# Altium PCB RDdengkuan - 副本 - 副本.PcbDoc (part 1 of 2)
Units mm, origin at the board's own origin, x right, y up, seen from the top; angles counter-clockwise.
Board outline 99.8 x 100 mm, 4 copper layers (Top Layer, VCC, GND, Bottom Layer); 147 components, 96 nets, 586 pads, 184 vias.
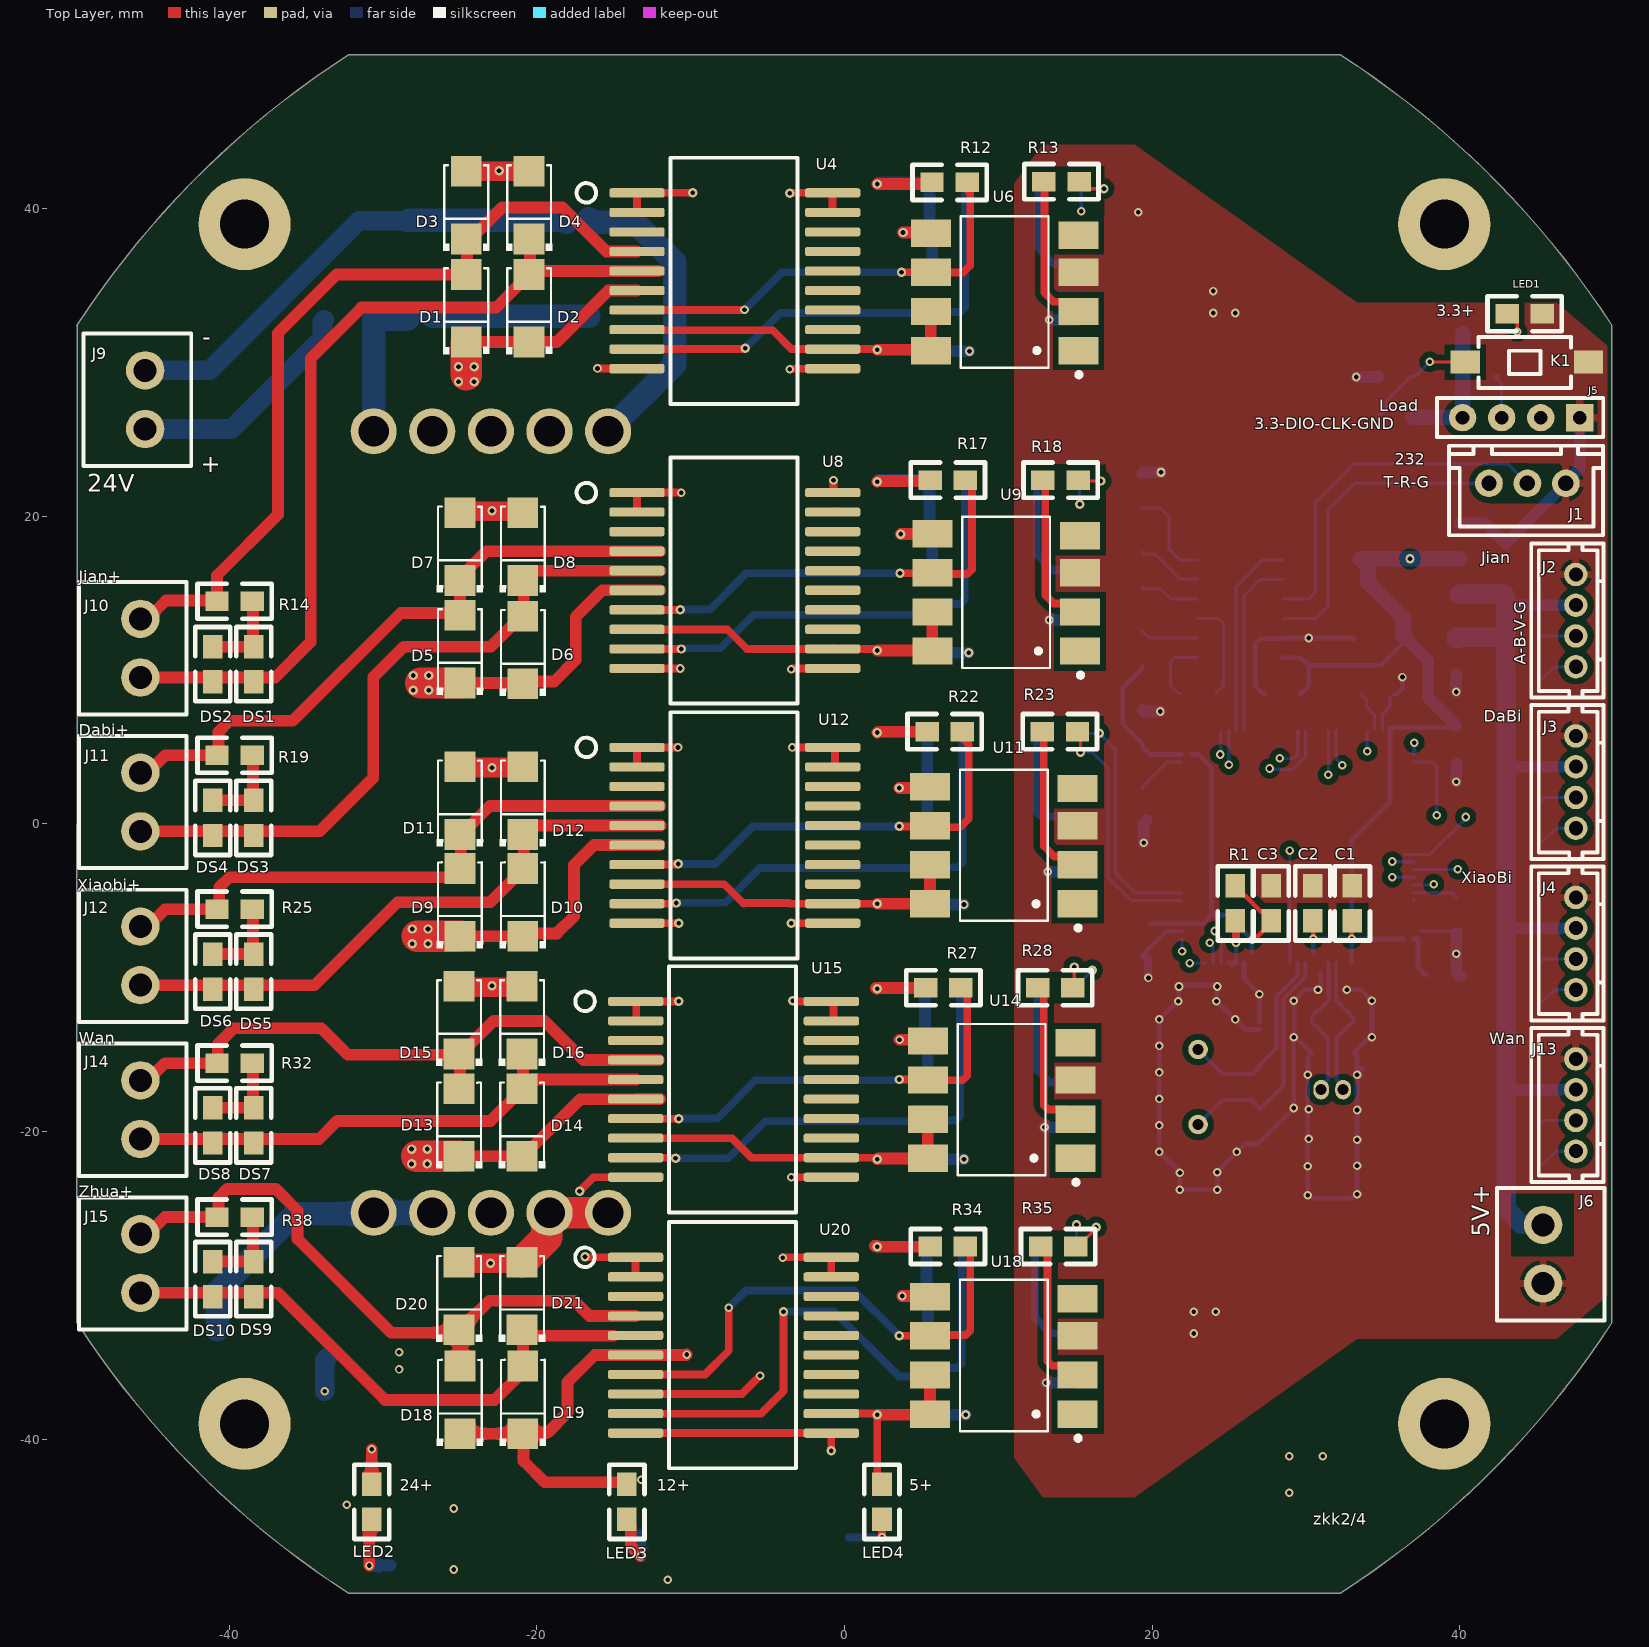
[diagram p0: Top Layer view]
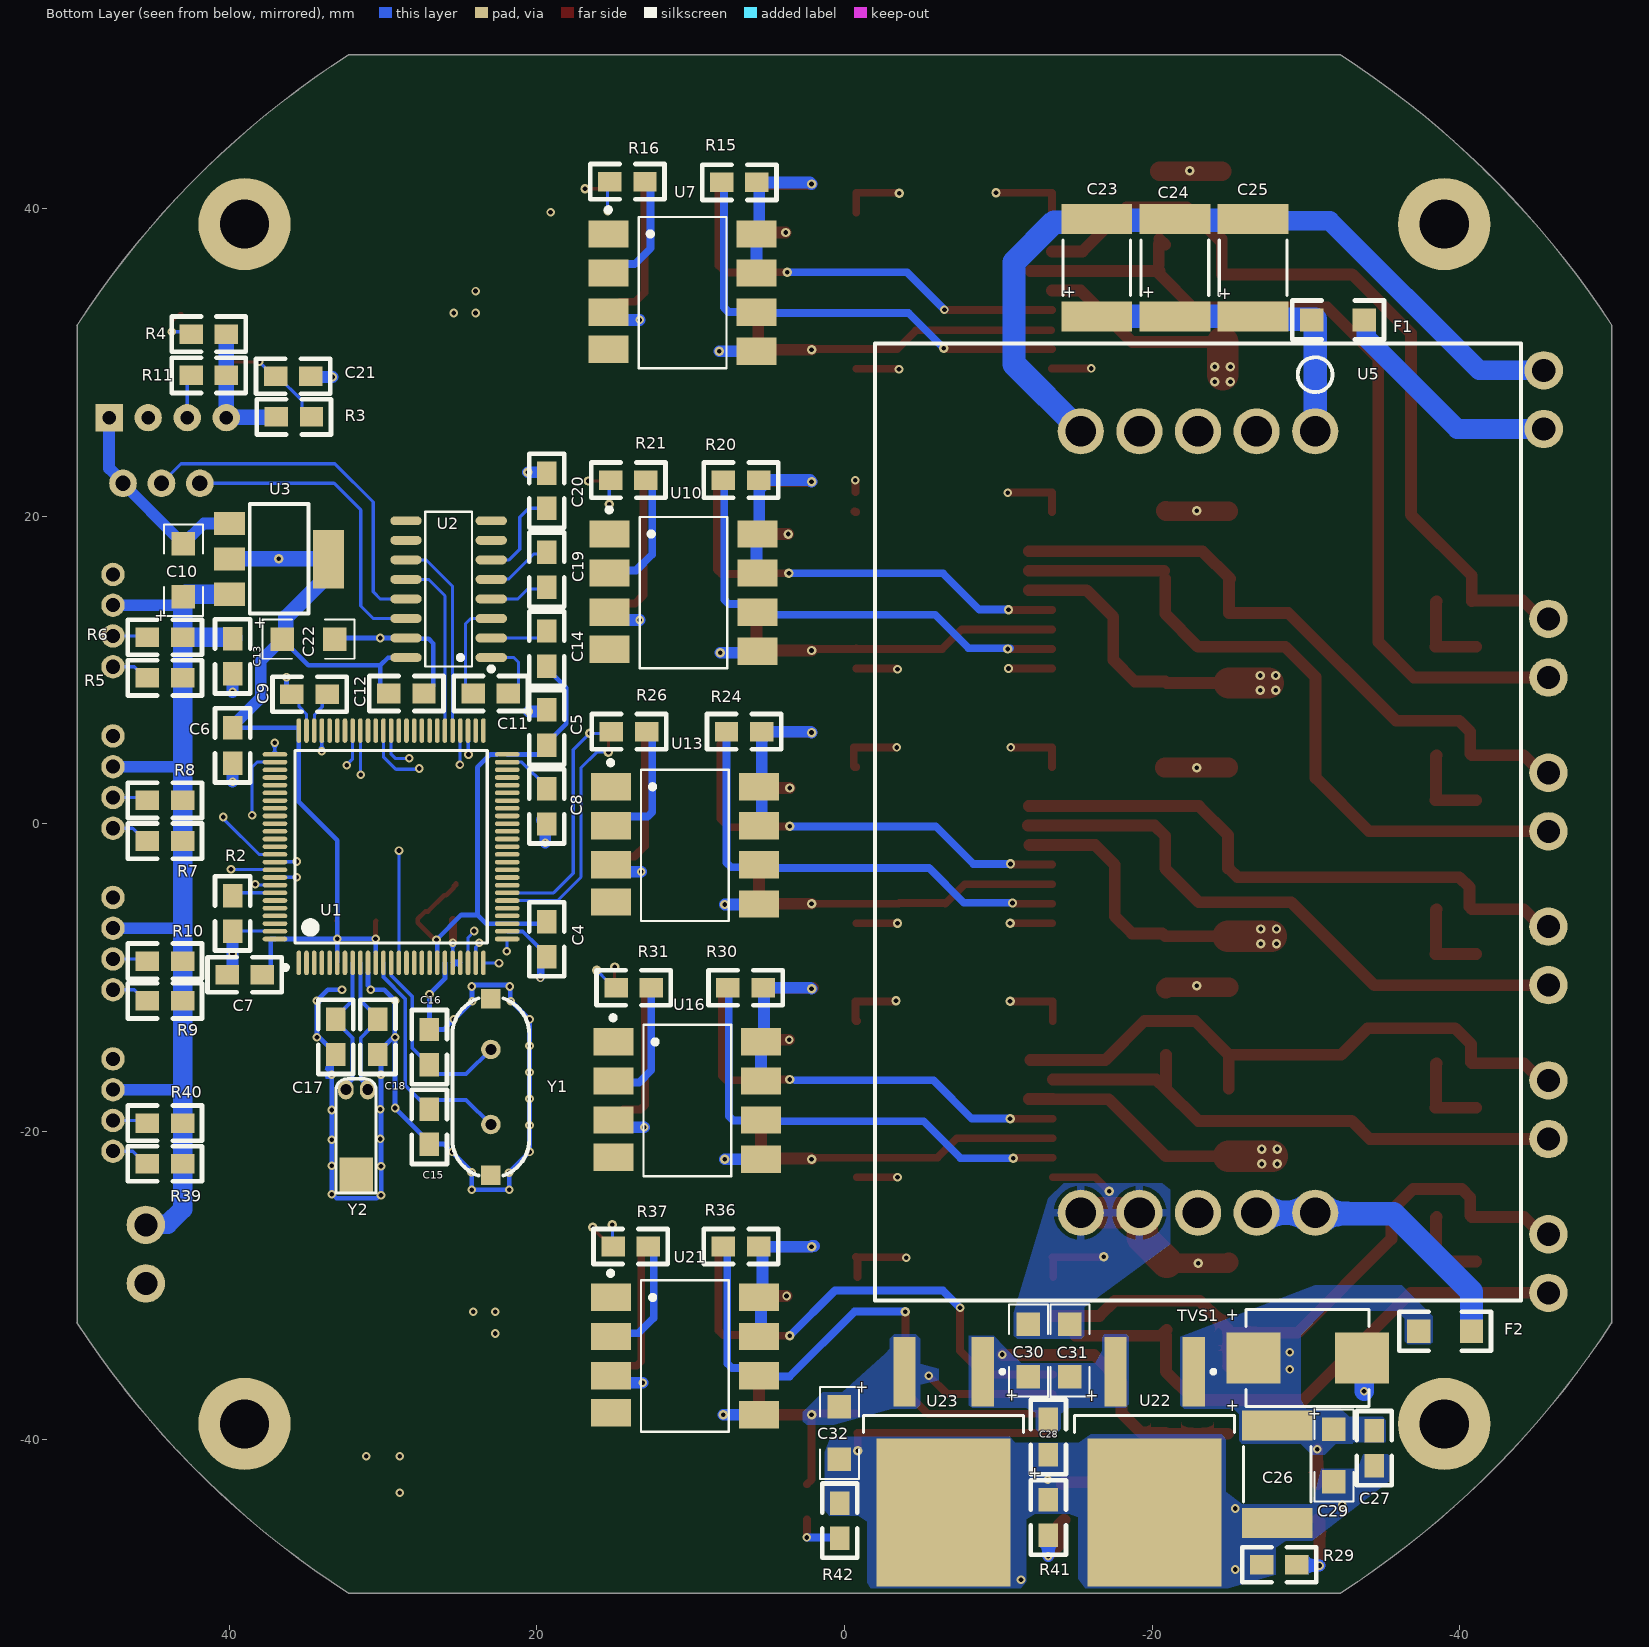
[diagram p1: Bottom Layer view, seen from below]
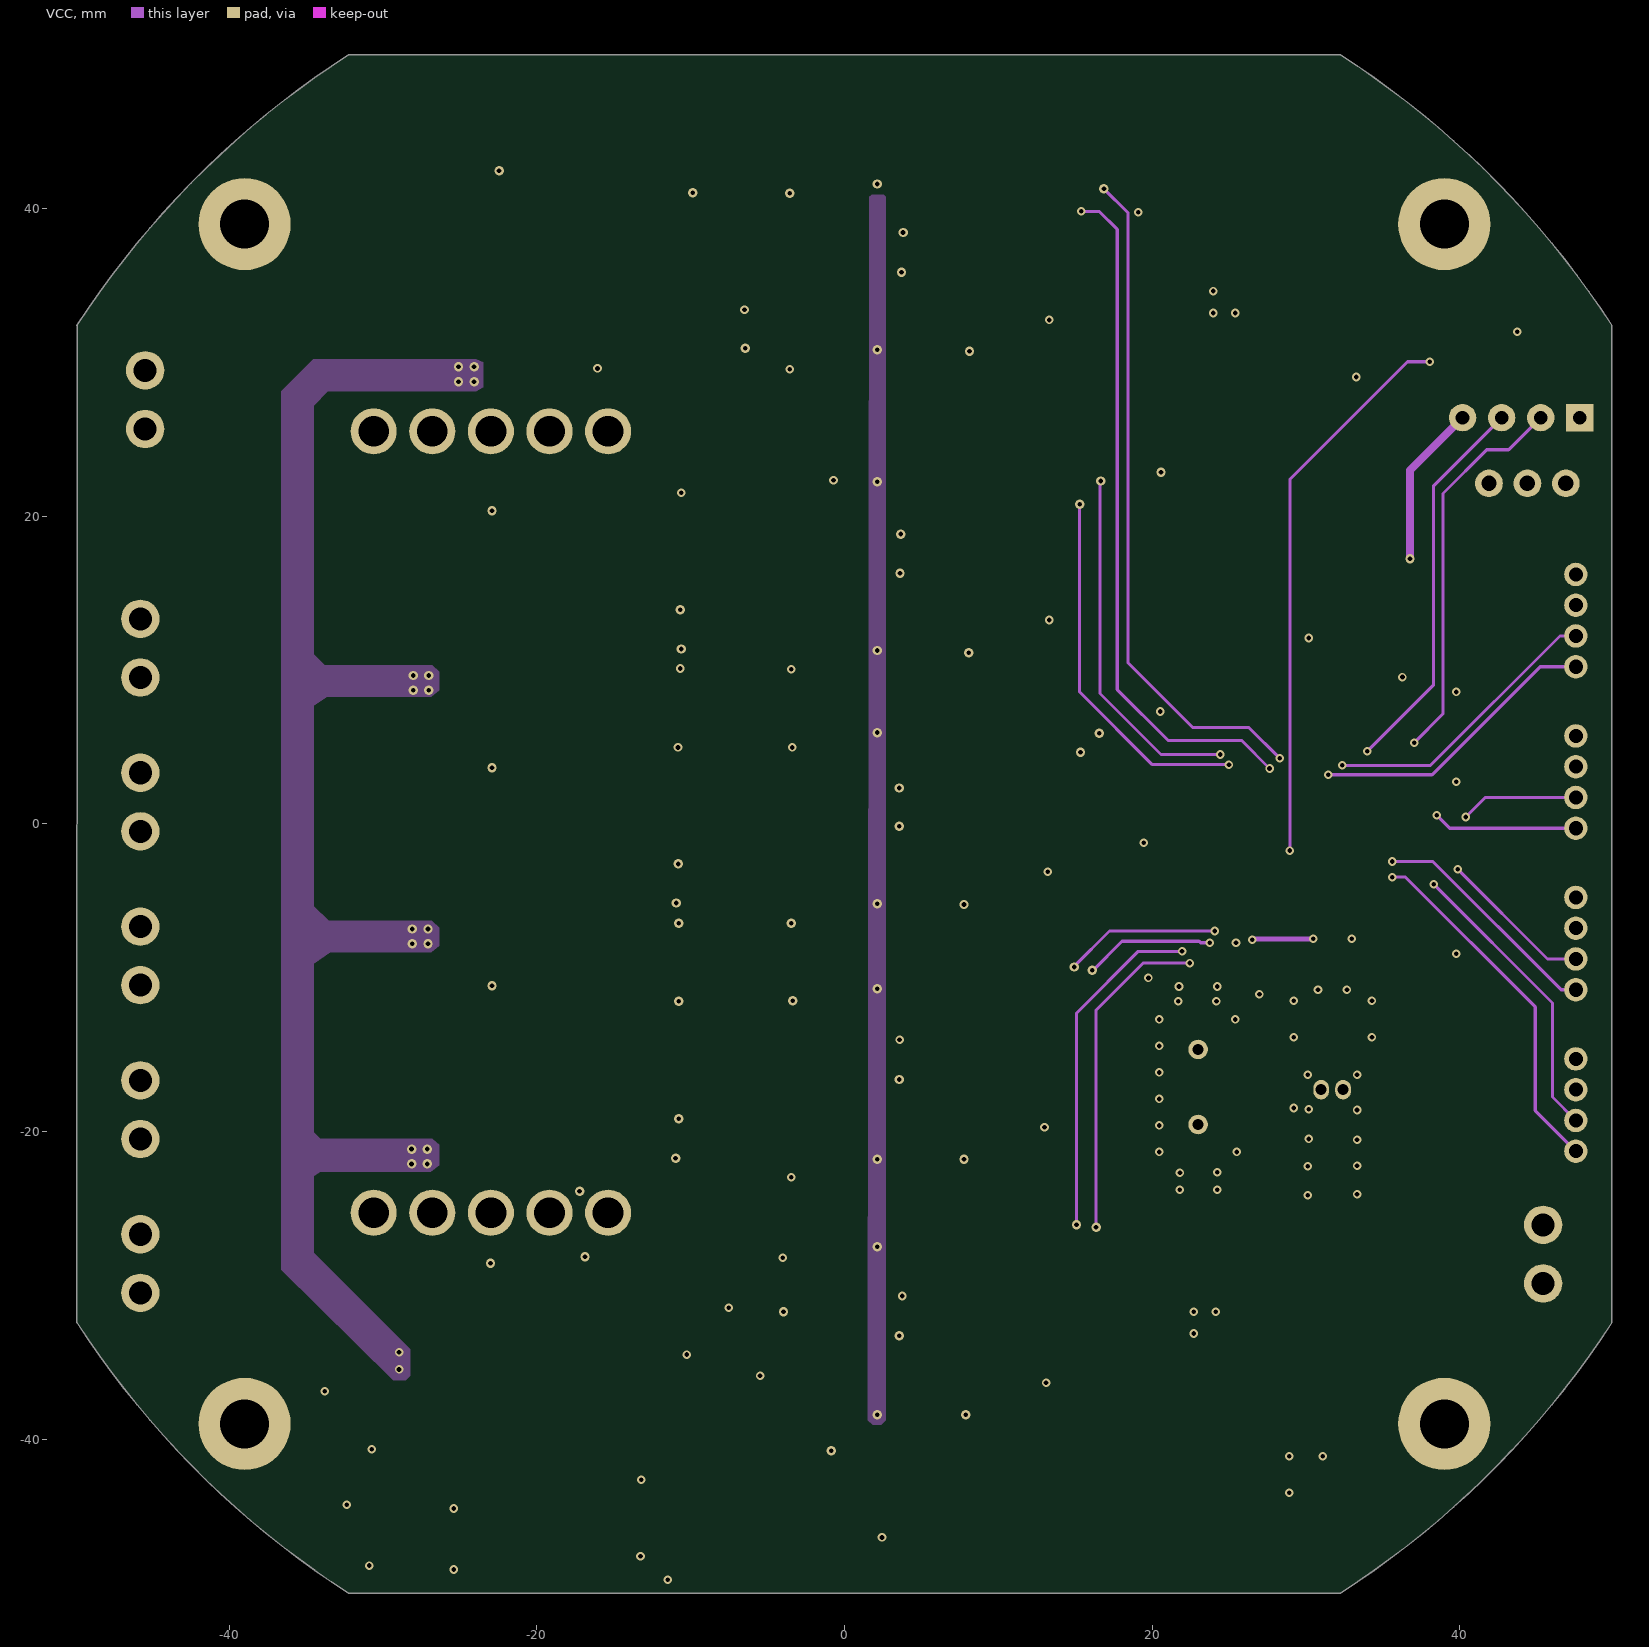
[diagram p2: VCC]
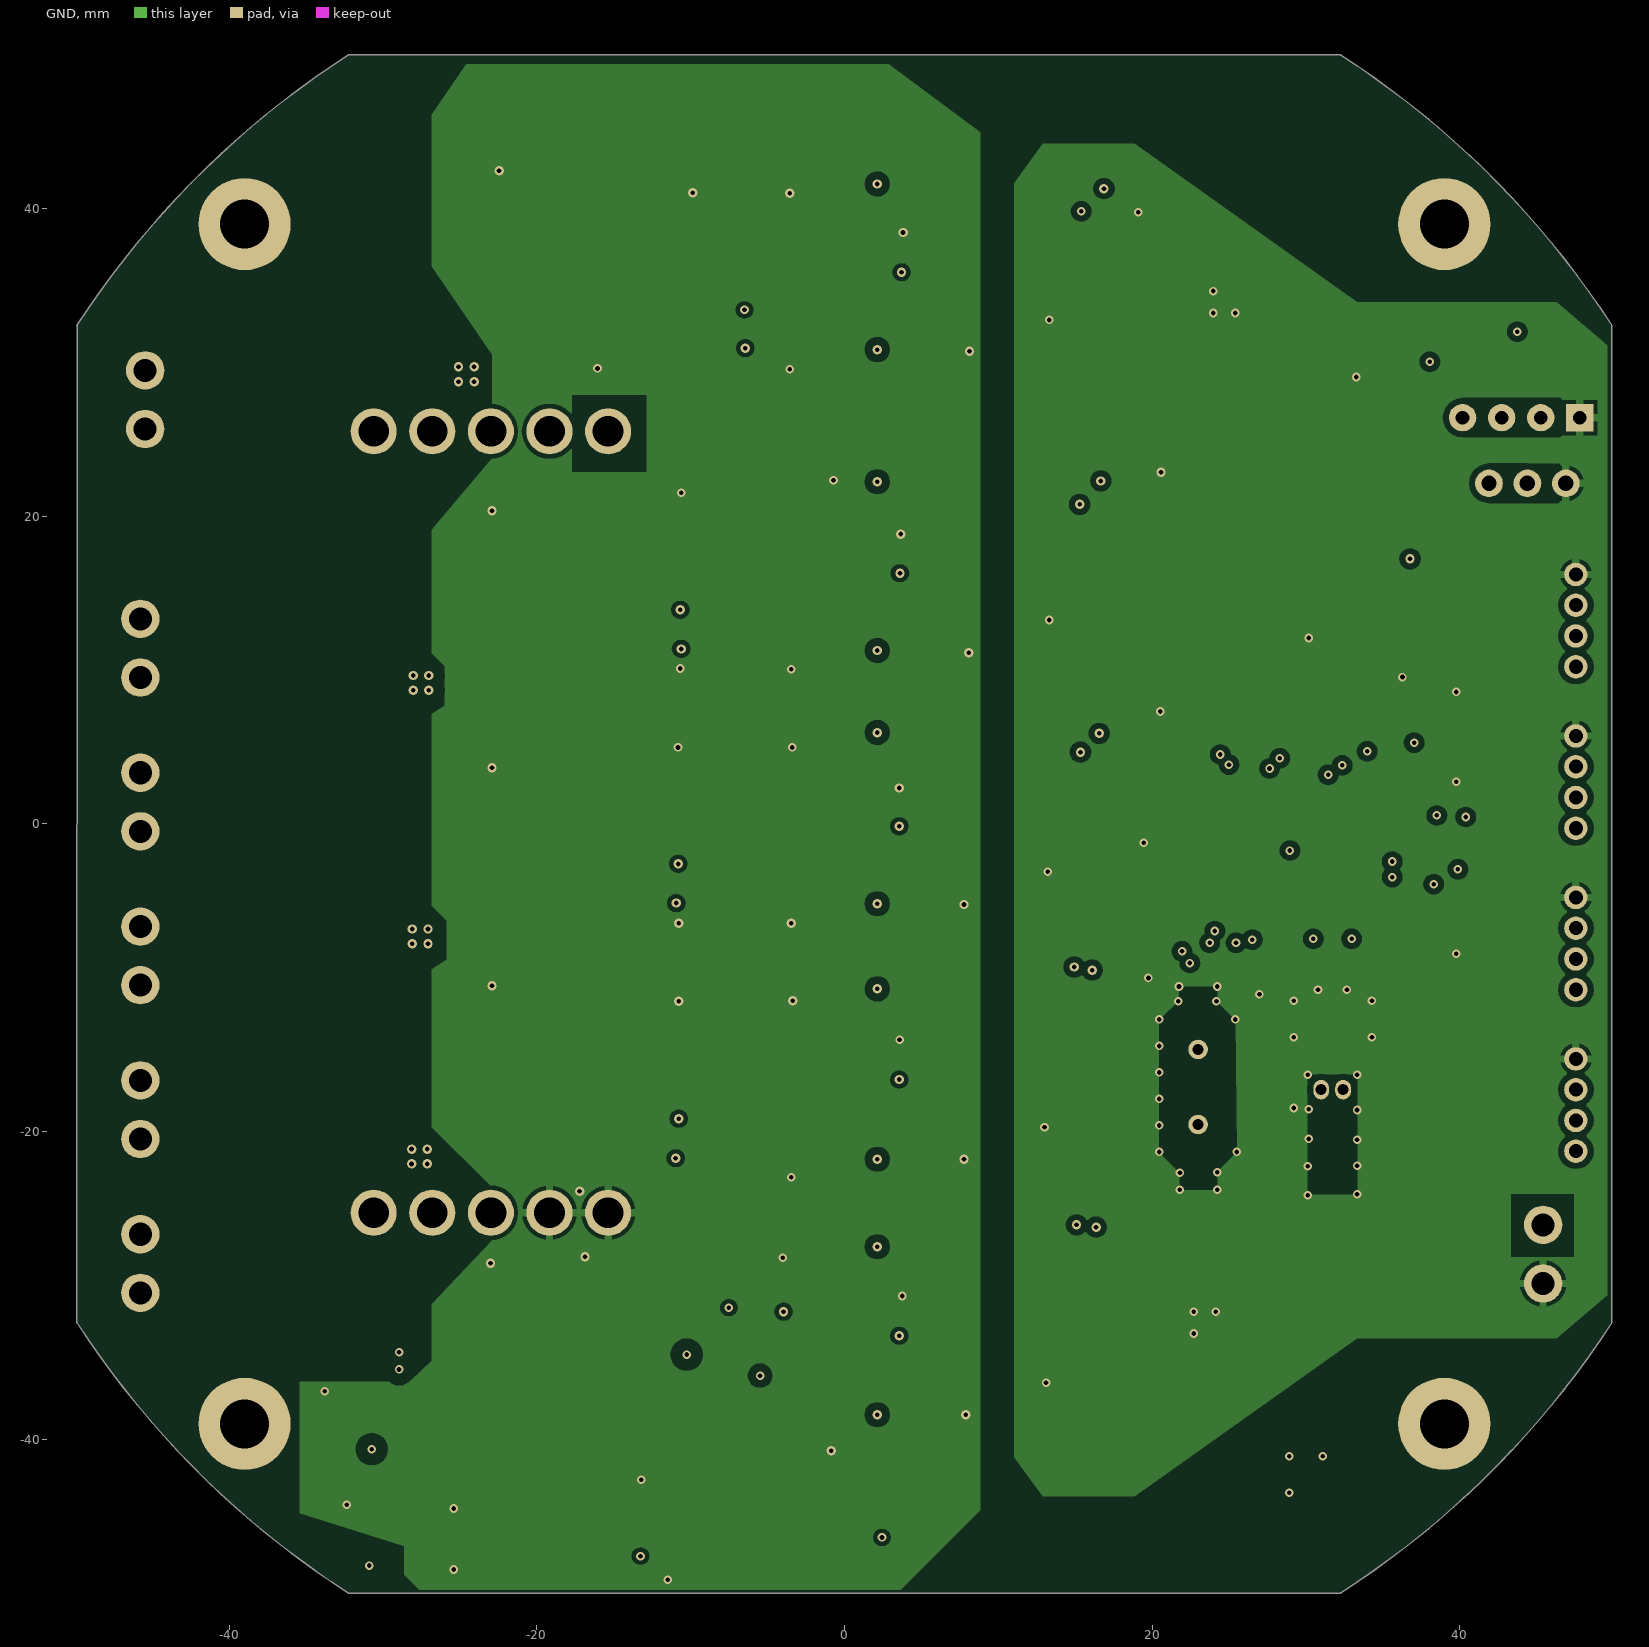
[diagram p3: GND]

## Layer stack, top to bottom
Top Solder: solder mask 0.0102, Solder Resist, Dk 3.5
Top Layer: signal copper 0.0356
Dielectric1: core 0.32, FR-4, Dk 4.8
VCC: signal copper 0.0356
Dielectric2: prepreg 0.32, FR-4, Dk 4.8
GND: signal copper 0.0356
Dielectric3: core 0.32, FR-4, Dk 4.8
Bottom Layer: signal copper 0.0356
Bottom Solder: solder mask 0.0102, Solder Resist, Dk 3.5

## Board outline
-49.894,-32.416 -49.886,32.406 -49.901,32.406 cw(c0,0) -32.253,50 32.253,50 cw(c0,0) 49.894,32.416 49.886,32.41 49.886,-32.406 49.896,-32.413 cw(c0,0) 32.253,-50 -32.253,-50 cw(c0,0)

## Design rules (kind name [scope] priority, off if disabled: settings)
Clearance GND1 [InNet('GND1')] p1: gap=0.381 ignorepadtopadclearanceinfootprint=TRUE
Clearance netcf [InNet('NetF1_1')  or InNet('NetC23_1')or InNet('NetC23_2')] p2: gap=0.762 ignorepadtopadclearanceinfootprint=TRUE
Clearance 3.3 [InNet('+3.3V')] p3: gap=0.381 ignorepadtopadclearanceinfootprint=TRUE
Clearance +5V [InNet('+5V')] p4: gap=0.508 ignorepadtopadclearanceinfootprint=TRUE
Clearance V5 [InNet('VCC_5V')] p5: gap=0.508 ignorepadtopadclearanceinfootprint=TRUE
Clearance Polygon [InNet('VCC_24V') or InNet('OUT1') or  InNet('OUT2') or  InNet('OUT3') or  InNet('OUT4') or  InNet('OUT5') or  InNet('OUT6') or  InNet('OUT7') or  InNet('OUT8') or  InNet('OUT9') or  InNet('OUT10') OR InNet('VCC_12V')] p6: gap=0.762 ignorepadtopadclearanceinfootprint=TRUE except(0.305: THPad-THPad THPad-Fill THPad-Poly THPad-Region)
Clearance [All] p7: gap=0.279 ignorepadtopadclearanceinfootprint=TRUE
FabricationTestPointUsage TestPointUsage [All] p1: valid=0 allowmultiple=FALSE
FabricationTestpoint Testpoint [All] p1: side=3 testpointundercomponent=TRUE minsize=1.016 maxsize=2.54 preferedsize=1.524 minholesize=0 maxholesize=1.016 preferedholesize=0.813 testpointgrid=0.025 allowsidetop=TRUE allowsidebottom=TRUE usegrid=TRUE gridtolerance=0
HoleSize [All] p1: absolutevalues=TRUE maxlimit=3.81 minlimit=0.254 maxpercent=80.000 minpercent=20.000
MinimumSolderMaskSliver [All] p1: minsoldermaskwidth=0.051
PlaneClearance [InNet('GND1')] p1: clearance=0.254
PolygonConnect PGND2B [OnBottomLayer{ InNet('GND2') }] p1: thpad.connectstyle=Relief thpad.reliefconductorwidth=0.508 thpad.reliefentries=4 thpad.polygonreliefangle="90 Angle" thpad.airgapwidth=0.254 smdpad.connectstyle=Direct smdpad.reliefconductorwidth=0.254 smdpad.reliefentries=4 smdpad.polygonreliefangle="90 Angle" smdpad.airgapwidth=0.254 via.connectstyle=Direct via.reliefconductorwidth=0.254 via.reliefentries=4 via.polygonreliefangle="90 Angle" via.airgapwidth=0.254
PolygonConnect PV24 [InNet('VCC_24V')] p2: thpad.connectstyle=Relief thpad.reliefconductorwidth=1.27 thpad.reliefentries=4 thpad.polygonreliefangle="90 Angle" thpad.airgapwidth=0.203 smdpad.connectstyle=Direct smdpad.reliefconductorwidth=0.762 smdpad.reliefentries=4 smdpad.polygonreliefangle="90 Angle" smdpad.airgapwidth=0.305 via.connectstyle=Direct via.reliefconductorwidth=0.254 via.reliefentries=4 via.polygonreliefangle="90 Angle" via.airgapwidth=0.254
PolygonConnect PV12 [InNet('VCC_12V')] p3: thpad.connectstyle=Relief thpad.reliefconductorwidth=0.254 thpad.reliefentries=4 thpad.polygonreliefangle="90 Angle" thpad.airgapwidth=0.254 smdpad.connectstyle=Direct smdpad.reliefconductorwidth=0.254 smdpad.reliefentries=4 smdpad.polygonreliefangle="90 Angle" smdpad.airgapwidth=0.254 via.connectstyle=Direct via.reliefconductorwidth=0.254 via.reliefentries=4 via.polygonreliefangle="90 Angle" via.airgapwidth=0.254
PolygonConnect PV5 [InNet('VCC_5V')] p4: connectstyle=Direct reliefconductorwidth=0.254 reliefentries=4 polygonreliefangle="90 Angle" airgapwidth=0.254
PolygonConnect PGND1 [InNet('GND1')] p5: thpad.connectstyle=Relief thpad.reliefconductorwidth=0.508 thpad.reliefentries=4 thpad.polygonreliefangle="90 Angle" thpad.airgapwidth=0.254 smdpad.connectstyle=Direct smdpad.reliefconductorwidth=0.305 smdpad.reliefentries=4 smdpad.polygonreliefangle="90 Angle" smdpad.airgapwidth=0.254 via.connectstyle=Direct via.reliefconductorwidth=0.305 via.reliefentries=4 via.polygonreliefangle="90 Angle" via.airgapwidth=0.254
PolygonConnect PGND2D [InComponent('D3')or  InComponent('D4') or InComponent('D7')or InComponent('D8')or InComponent('D11')or InComponent('D12')or InComponent('D15')or InComponent('D16')or InComponent('D20')or InComponent('D21')or  InComponent('C3')or  InComponent('C2')or   InComponent('C1')] p6: connectstyle=Direct reliefconductorwidth=0.254 reliefentries=4 polygonreliefangle="90 Angle" airgapwidth=0.254
PolygonConnect PGND2 [InNet('GND2')] p7: thpad.connectstyle=Relief thpad.reliefconductorwidth=0.508 thpad.reliefentries=4 thpad.polygonreliefangle="90 Angle" thpad.airgapwidth=0.254 smdpad.connectstyle=Relief smdpad.reliefconductorwidth=0.508 smdpad.reliefentries=4 smdpad.polygonreliefangle="90 Angle" smdpad.airgapwidth=0.254 via.connectstyle=Direct via.reliefconductorwidth=0.305 via.reliefentries=4 via.polygonreliefangle="90 Angle" via.airgapwidth=0.305
PolygonConnect [All] p8: connectstyle=Relief reliefconductorwidth=0.254 reliefentries=4 polygonreliefangle="90 Angle" airgapwidth=0.254
RoomDefinition RD [InComponentClass('RD')] p1: confinementstyle=ConfineIn formatcopy=TRUE lockcomponents=FALSE outline -118.11,-226.695 -67.31,-226.695 -67.31,-201.295 -118.11,-201.295
RoutingVias [All] p1: holewidth=0.191 width=0.381 viastyle="Through Hole" minholewidth=0.127 minwidth=0.254 maxholewidth=0.711 maxwidth=1.27
SilkToSilkClearance [All] p1: silktosilkclearance=0.025
SilkToSolderMaskClearance SilkscreenOverComponentPads [IsPad] p1: minsilkscreentomaskgap=0.025 clearancetoexposedcopper=TRUE
SolderMaskExpansion [All] p1: expansion=0.102 istentingtop=FALSE
Width [All] p1: maxlimit=5.08 minlimit=0.203 preferedwidth=0.254 toplayer_prefwidth=0.203 minimp=50.000000 maximp=50.000000 favimp=50.000000
23 further rules are at their usual default settings.

## Components (designator, comment, footprint, x,y, rotation, side; value= is the part's Value field where it differs from the comment)
C1 "104" 0805 33.02,-6.299 r90 top
C2 "104" 0805 30.446,-6.299 r90 top
C3 "104" 0805 27.737,-6.299 r90 top
C4 "104" 0805 19.355,-6.35 r270 bottom
C5 "104" 0805 19.355,5.131 r90 bottom
C6 "104" 0805 39.776,6.248 r270 bottom
C7 "104" 0805 37.846,-9.804 r0 bottom
C8 "4.7uF" 0805 19.355,0 r90 bottom
C9 "4.7uF" 0805 35.916,8.433 r180 bottom
C10 "Cap Pol1" 钽电容小 42.85,16.434 r270 bottom value=10uF
C11 "104" 0805 24.13,8.484 r180 bottom
C12 "104" 0805 29.616,8.484 r180 bottom
C13 "104" 0805 39.776,9.754 r90 bottom
C14 "104" 0805 19.355,12.548 r270 bottom
C15 "22pF" 0805 26.975,-20.828 r90 bottom
C16 "22pF" 0805 26.975,-13.36 r270 bottom
C17 "22pF" 0805 33.071,-14.986 r90 bottom
C18 "22pF" 0805 30.328,-14.986 r90 bottom
C19 "104" 0805 19.355,17.678 r270 bottom
C20 "104" 0805 19.355,22.809 r270 bottom
C21 "104" 0805 36.982,29.108 r180 bottom
C22 "Cap Pol1" 钽电容小 34.9,11.887 r0 bottom value=10uF
C23 "Cap Pol1" 钽电容大 -16.408,36.17 r180 bottom value=22uF
C24 "Cap Pol1" 钽电容大 -21.488,36.17 r180 bottom value=100uF
C25 "Cap Pol1" 钽电容大 -26.568,36.17 r180 bottom value=100uF
C26 "Cap Pol1" 钽电容大 -28.143,-42.266 r0 bottom value=100uF
C27 "0.1uF" 0805 -34.442,-41.719 r90 bottom
C28 "0.1uF" 0805 -13.259,-40.996 r90 bottom
C29 "Cap Pol1" 钽电容小 -31.699,-40.996 r90 bottom value=2.2uF
C30 "Cap Pol1" 钽电容小 -12.09,-34.29 r270 bottom value=1uF
C31 "Cap Pol1" 钽电容小 -14.783,-34.29 r270 bottom value=2.2uF
C32 "Cap Pol1" 钽电容小 0.457,-39.522 r90 bottom value=1uF
D1 "Diode 1N4149" 肖特基二极管SS34 -24.566,33.528 r90 top
D2 "Diode 1N4149" 肖特基二极管SS34 -20.472,33.528 r90 top
D3 "Diode 1N4149" 肖特基二极管SS34 -24.566,40.234 r90 top
D4 "Diode 1N4149" 肖特基二极管SS34 -20.472,40.234 r90 top
D5 "Diode 1N4149" 肖特基二极管SS34 -24.972,11.364 r90 top
D6 "Diode 1N4149" 肖特基二极管SS34 -20.879,11.313 r90 top
D7 "Diode 1N4149" 肖特基二极管SS34 -24.972,18.033 r90 top
D8 "Diode 1N4149" 肖特基二极管SS34 -20.879,18.033 r90 top
D9 "Diode 1N4149" 肖特基二极管SS34 -24.972,-5.095 r90 top
D10 "Diode 1N4149" 肖特基二极管SS34 -20.879,-5.095 r90 top
D11 "Diode 1N4149" 肖特基二极管SS34 -24.972,1.523 r90 top
D12 "Diode 1N4149" 肖特基二极管SS34 -20.879,1.523 r90 top
D13 "Diode 1N4149" 肖特基二极管SS34 -25.023,-19.406 r90 top
D14 "Diode 1N4149" 肖特基二极管SS34 -20.93,-19.406 r90 top
D15 "Diode 1N4149" 肖特基二极管SS34 -25.023,-12.752 r90 top
D16 "Diode 1N4149" 肖特基二极管SS34 -20.93,-12.752 r90 top
D18 "Diode 1N4149" 肖特基二极管SS34 -24.972,-37.44 r90 top
D19 "Diode 1N4149" 肖特基二极管SS34 -20.879,-37.44 r90 top
D20 "Diode 1N4149" 肖特基二极管SS34 -25.023,-30.683 r90 top
D21 "Diode 1N4149" 肖特基二极管SS34 -20.93,-30.683 r90 top
DS1 "LED" 0805 -38.405,9.246 r90 top
DS2 "LED" 0805 -41.072,11.532 r270 top
DS3 "LED" 0805 -38.405,-0.749 r90 top
DS4 "LED" 0805 -41.072,1.537 r270 top
DS5 "LED" 0805 -38.405,-10.744 r90 top
DS6 "LED" 0805 -41.072,-8.458 r270 top
DS7 "LED" 0805 -38.405,-20.739 r90 top
DS8 "LED" 0805 -41.072,-18.453 r270 top
DS9 "LED" 0805 -38.405,-30.734 r90 top
DS10 "LED" 0805 -41.072,-28.448 r270 top
F1 "THERMAL FUSE" 1206 -33.807,32.766 r0 bottom
F2 "THERMAL FUSE" 1206 -40.767,-32.969 r0 bottom
J1 "CON3" CON3BB 44.399,22.149 r180 top
J2 "CON4" CONN4B 47.549,13.224 r90 top
J3 "CON4" CONN4B 47.549,2.725 r90 top
J4 "CON4" CONN4B 47.549,-7.773 r90 top
J5 "CON4" CON4 43.993,26.416 r0 top
J6 "CON2" CONN-TH_2P-P3.81_DB2EVC-3.81-2P-BK 45.415,-27.965 r90 top
J9 "CON2" CONN-TH_2P-P3.81_DB2EVC-3.81-2P-BK -45.466,27.584 r270 top
J10 "CON2" CONN-TH_2P-P3.81_DB2EVC-3.81-2P-BK -45.771,11.43 r270 top
J11 "CON2" CONN-TH_2P-P3.81_DB2EVC-3.81-2P-BK -45.771,1.429 r270 top
J12 "CON2" CONN-TH_2P-P3.81_DB2EVC-3.81-2P-BK -45.771,-8.572 r270 top
J13 "CON4" CONN4B 47.549,-18.272 r90 top
J14 "CON2" CONN-TH_2P-P3.81_DB2EVC-3.81-2P-BK -45.771,-18.574 r270 top
J15 "CON2" CONN-TH_2P-P3.81_DB2EVC-3.81-2P-BK -45.771,-28.575 r270 top
K1 "KEY4" 按钮 44.238,29.964 r0 top
LED1 "LED" 0805 43.078,33.172 r0 top
LED2 "LED" 0805 -30.734,-42.926 r270 top
LED3 "LED" 0805 -14.148,-42.926 r270 top
LED4 "LED" 0805 2.438,-42.926 r270 top
R1 "10R" 0805 25.4,-6.299 r90 top
R2 "10K" 0805 39.776,-4.674 r270 bottom
R3 "1.5K" 0805 34.646,26.467 r0 bottom
R4 "10K" 0805 42.469,31.852 r180 bottom
R5 "10K" 0805 45.314,9.5 r180 bottom
R6 "10K" 0805 45.314,12.141 r180 bottom
R7 "10K" 0805 45.314,-1.106 r180 bottom
R8 "10K" 0805 45.314,1.535 r180 bottom
R9 "10K" 0805 45.314,-11.499 r180 bottom
R10 "10K" 0805 45.314,-8.908 r180 bottom
R11 "10K" 0805 42.469,29.159 r180 bottom
R12 "332" 0805 5.691,41.708 r0 top
R13 "201" 0805 15.249,41.759 r180 top
R14 "10K" 0805 -38.506,14.478 r180 top
R15 "332" 0805 5.691,41.708 r0 bottom
R16 "201" 0805 15.249,41.759 r180 bottom
R17 "332" 0805 5.58,22.357 r0 top
R18 "201" 0805 15.189,22.357 r180 top
R19 "10K" 0805 -38.506,4.47 r180 top
R20 "332" 0805 5.58,22.357 r0 bottom
R21 "201" 0805 15.189,22.357 r180 bottom
R22 "332" 0805 5.369,6.003 r0 top
R23 "201" 0805 15.147,6.003 r180 top
R24 "332" 0805 5.377,6.003 r0 bottom
R25 "10K" 0805 -38.506,-5.537 r180 top
R26 "201" 0805 15.147,6.003 r180 bottom
R27 "332" 0805 5.284,-10.648 r0 top
R28 "201" 0805 14.842,-10.648 r180 top
R29 "Res2" 0805 -29.413,-48.158 r0 bottom value=10K
R30 "332" 0805 5.284,-10.648 r0 bottom
R31 "201" 0805 14.842,-10.648 r180 bottom
R32 "10K" 0805 -38.506,-15.545 r180 top
R34 "332" 0805 5.58,-27.466 r0 top
R35 "201" 0805 15.037,-27.466 r180 top
R36 "332" 0805 5.58,-27.466 r0 bottom
R37 "201" 0805 15.037,-27.466 r180 bottom
R38 "10K" 0805 -38.506,-25.552 r180 top
R39 "10K" 0805 45.314,-22.087 r180 bottom
R40 "10K" 0805 45.314,-19.445 r180 bottom
R41 "10K" 0805 -13.259,-46.228 r90 bottom
R42 "10K" 0805 0.305,-46.431 r90 bottom
TVS1 "TVS" TVS -30.115,-34.708 r270 bottom
U1 "STM32F407VGT6" STM32F407VGT6 29.437,0 r180 bottom locked
U2 "MAX3232" MAX3232 25.625,15.138 r90 bottom
U3 "AMS1117-3.3_C347222" AMS1117 36.842,17.379 r270 bottom
U4 "L298P" L298P -7.13,35.189 r180 top
U5 "URF4824QB-200W" URF4824QB-200W（24稳压） -23.114,0 r0 bottom locked
U6 "6n137" 6N137 10.414,34.036 r0 top
U7 "6n137" 6N137 10.525,35.101 r0 bottom
U8 "L298P" L298P -7.13,15.703 r180 top
U9 "6n137" 6N137 10.516,14.503 r0 top
U10 "6n137" 6N137 10.465,15.596 r0 bottom
U11 "6n137" 6N137 10.363,-1.93 r0 top
U12 "L298P" L298P -7.13,-0.864 r180 top
U13 "6n137" 6N137 10.372,-0.839 r0 bottom
U14 "6n137" 6N137 10.219,-18.466 r0 top
U15 "L298P" L298P -7.214,-17.374 r180 top
U16 "6n137" 6N137 10.211,-17.424 r0 bottom
U18 "6n137" 6N137 10.363,-35.103 r0 top
U20 "L298P" L298P -7.22,-34.012 r180 top
U21 "6n137" 6N137 10.372,-34.036 r0 bottom
U22 "7812" 7812 -20.168,-41.453 r180 bottom
U23 "7805" 7805 -6.452,-41.453 r180 bottom
Y1 "XTAL8" XTAL8（晶振） 23.114,-16.815 r90 bottom locked
Y2 "XTAL32-100" XTAL32-100（晶振） 31.75,-19.558 r270 bottom locked

## Footprints (in the part's own frame and the unit in brackets; to place one, negate y for a bottom-side part, rotate by r counter-clockwise, add the part's x,y. Pads: shape width x height; smd on the part's side, far side on the other; paste and mask are expansions set on the pad)
6N137 [mm]
  rect 2.6x1.78 smd mask+0.102: 1(4.796,-3.258) 2(4.796,-0.718) 3(4.796,1.822) 4(4.796,4.235) 5(-4.804,4.362) 6(-4.804,1.822) 7(-4.804,-0.718) 8(-4.804,-3.258)
  silkscreen extent -2.86,-4.98 4.98,5.47
0805 [mil]
  rect 60x50 smd: 1(0,0) 2(90,0)
  silkscreen extent -50,-45 140,45
1206 [mil]
  rect 60x60 smd: 1(0,0) 2(135,0)
  silkscreen extent -50,-50 185,50
7805 [mm]
  rect 1.45x4.5 smd: 1(2.54,5.848) 3(-2.54,5.848)
  rect 8.7x9.6 smd: 2(0,-3.302)
  silkscreen extent -5.2,1.9 5.2,5.97, body extent -5.2,-6.35 5.2,3, height 4.67
7812 [mm]
  rect 1.45x4.5 smd: 1(2.54,5.848) 3(-2.54,5.848)
  rect 8.7x9.6 smd: 2(0,-3.302)
  silkscreen extent -5.2,1.9 5.2,5.97, body extent -5.2,-6.35 5.2,3, height 4.67
AMS1117 [mil]
  rect 59x79 smd: 1(-84.88,-123.54) 2(5.67,-123.54) 3(96.22,-123.54)
  rect 150x79 smd: 4(6.34,130)
  silkscreen extent -134,-72 146,78
CON3BB [mm]
  round 1.8 hole 1 paste+0 mask+0.05: 1(-2.5,0) 2(0,0) 3(2.5,0)
  silkscreen extent -4.92,-2.44 5.09,3.38
CON4 [mil]
  rect 70x70 hole 35: 1(150,0)
  round 70 hole 35: 2(50,0) 3(-50,0) 4(-150,0)
  silkscreen extent -215,-50 210,50
CONN4B [mil]
  round 60 hole 36 paste+0 mask+1.97: 1(-118.11,0) 2(-39.37,0) 3(39.37,0) 4(118.11,0)
  silkscreen extent -197,-71 197,114
CONN-TH_2P-P3.81_DB2EVC-3.81-2P-BK [mm]
  round 2.5 hole 1.5: 1(-1.905,0) 2(1.905,0)
  silkscreen extent -4.3,-4 4.3,3
L298P [mm]
  rrect50% 3.6x0.6 smd: 1(6.361,-5.842) 2(6.361,-4.572) 3(6.361,-3.302) 4(6.361,-2.032) 5(6.361,-0.762) 6(6.361,0.508) 7(6.361,1.778) 8(6.361,3.048) 9(6.361,4.318) 10(6.361,5.588) 11(-6.361,5.588) 12(-6.361,4.318) 13(-6.361,3.048) 14(-6.361,1.778) 15(-6.361,0.508) 16(-6.361,-0.762) 17(-6.361,-2.032) 18(-6.361,-3.302) 19(-6.361,-4.572) 20(-6.361,-5.842)
  silkscreen extent -4.06,-8.13 10.28,7.87
MAX3232 [mm]
  oval 0.574x2.038 smd mask+0.102: 1(-4.317,-2.664) 2(-3.047,-2.664) 3(-1.777,-2.664) 4(-0.507,-2.664) 5(0.763,-2.664) 6(2.033,-2.664) 7(3.303,-2.664) 8(4.573,-2.664) 9(4.573,2.874) 10(3.303,2.874) 11(2.033,2.874) 12(0.763,2.874) 13(-0.507,2.874) 14(-1.777,2.874) 15(-3.047,2.874) 16(-4.317,2.874)
  silkscreen extent -5.21,-2.81 5.15,1.63
STM32F407VGT6 [mm]
  oval 0.3x1.6 smd paste-100 mask+0.051: 1(-6.032,-9.026) 2(-5.532,-9.026) 3(-5.032,-9.026) 4(-4.532,-9.026) 5(-4.032,-9.026) 6(-3.532,-9.026) 7(-3.032,-9.026) 8(-2.532,-9.026) 9(-2.032,-9.026) 10(-1.532,-9.026) 11(-1.032,-9.026) 12(-0.532,-9.026) 13(-0.032,-9.026) 14(0.468,-9.026) 15(0.968,-9.026) 16(1.468,-9.026) 17(1.968,-9.026) 18(2.468,-9.026) 19(2.968,-9.026) 20(3.468,-9.026) 21(3.968,-9.026) 22(4.468,-9.026) 23(4.968,-9.026) 24(5.468,-9.026) 25(5.968,-9.026) 51(5.968,6.073) 52(5.468,6.073) 53(4.968,6.073) 54(4.468,6.073) 55(3.968,6.073) 56(3.468,6.073) 57(2.968,6.073) 58(2.468,6.073) 59(1.968,6.073) 60(1.468,6.073) 61(0.968,6.073) 62(0.468,6.073) 63(-0.032,6.073) 64(-0.532,6.073) 65(-1.032,6.073) 66(-1.532,6.073) 67(-2.032,6.073) 68(-2.532,6.073) 69(-3.032,6.073) 70(-3.532,6.073) 71(-4.032,6.073) 72(-4.532,6.073) 73(-5.032,6.073) 74(-5.532,6.073) 75(-6.032,6.073)
  oval 1.6x0.3 smd paste-100 mask+0.051: 26(7.518,-7.476) 27(7.518,-6.977) 28(7.518,-6.476) 29(7.518,-5.977) 30(7.518,-5.476) 31(7.518,-4.977) 32(7.518,-4.476) 33(7.518,-3.977) 34(7.518,-3.476) 35(7.518,-2.977) 36(7.518,-2.477) 37(7.518,-1.976) 38(7.518,-1.477) 39(7.518,-0.976) 40(7.518,-0.477) 41(7.518,0.024) 42(7.518,0.523) 43(7.518,1.024) 44(7.518,1.523) 45(7.518,2.024) 46(7.518,2.523) 47(7.518,3.024) 48(7.518,3.523) 49(7.518,4.024) 50(7.518,4.523) 76(-7.582,4.523) 77(-7.582,4.024) 78(-7.582,3.523) 79(-7.582,3.024) 80(-7.582,2.523) 81(-7.582,2.024) 82(-7.582,1.523) 83(-7.582,1.024) 84(-7.582,0.523) 85(-7.582,0.024) 86(-7.582,-0.477) 87(-7.582,-0.976) 88(-7.582,-1.477) 89(-7.582,-1.976) 90(-7.582,-2.476) 91(-7.582,-2.977) 92(-7.582,-3.476) 93(-7.582,-3.977) 94(-7.582,-4.476) 95(-7.582,-4.977) 96(-7.582,-5.476) 97(-7.582,-5.977) 98(-7.582,-6.476) 99(-7.582,-6.977) 100(-7.582,-7.476)
  silkscreen extent -7.06,-9.47 6.22,4.77
TVS [mm]
  rect 3.3x3.5 smd: 1(0,3.525) 2(0,-3.525)
  silkscreen extent -3.15,-4 3.15,4
URF4824QB-200W（24稳压） [mm]
  round 3 hole 2: 1(-7.493,-25.527) 2(-3.683,-25.527) 3(0.127,-25.527) 4(3.937,-25.527) 5(7.747,-25.527) 6(7.747,25.273) 7(3.937,25.273) 8(0.127,25.273) 9(-3.683,25.273) 10(-7.493,25.273)
  silkscreen extent -20.87,-31.24 21.13,30.99
XTAL8（晶振） [mil]
  round 50 hole 28: 1(-107.13,-5) 2(85,-5)
  rect 50x50 smd: ""(-237.44,-5) ""(215.31,-5)
  silkscreen extent -238,-103 216,93
XTAL32-100（晶振） [mil]
  oval 50x40 hole 28: 1(-90,-26) 2(-90,30)
  rect 92.13x86 smd: ""(130,1)
  silkscreen extent -118,-51 174,51
按钮 [mm]
  rect 1.9x1.5 smd mask+0.102: 1(-3.876,0.059) 2(4.124,0.059)
  silkscreen extent -3.01,-1.61 2.99,1.69
肖特基二极管SS34 [mm]
  rect 2x2 smd: 1(-2.2,0.029) 2(2.2,0.029)
  silkscreen extent -2.98,-1.47 2.6,1.53
钽电容大 [mm]
  rect 4.6x1.95 smd: 1(0,-3.175) 2(0,3.175)
  silkscreen extent -2.2,-1.8 2.2,1.8
钽电容小 [mil]
  rect 60x60 smd: 1(65,-5) 2(-70,-5)
  silkscreen extent -120,-55 115,45

## Part data
C1 C2 C3 C4 C5 C6 C7 C8 C9 C27 C28: library part Cap, "Capacitor", LatestRevisionDate=17-Jul-2002, LatestRevisionNote="Re-released for DXP Platform.", PackageDescription="Radial Cap, Thru-Hole; 2 Leads; 0.3 in Pin Spacing", PackageReference=RAD-0.3, Published=8-Jun-2000, Publisher="Altium Limited"
C10 C22 C23 C24 C25 C26 C29 C30 C31 C32: "Polarized Capacitor (Radial)", LatestRevisionDate=17-Jul-2002, LatestRevisionNote="Re-released for DXP Platform.", PackageDescription="Polarized Capacitor (Radial); 2 Leads", PackageReference=RB7.6-15, Published=8-Jun-2000, Publisher="Altium Limited"
C11 C12 C13 C14 C15 C16 C17 C18 C19 C20 C21: library part CAP
D1 D2 D3 D4 D5 D6 D7 D8 D9 D10 D11 D12 D13 D14 D15 D16 D18 D19 D20 D21: "Computer Diode", Code_JEDEC=DO-204-AH, ComponentLink1Description="Manufacturer Link", ComponentLink1URL=http://www.national.com/, DatasheetVersion=1989, LatestRevisionDate=17-Jul-2002, LatestRevisionNote="Re-released for DXP Platform.", PackageDescription="Diode, Axial; Body 4.6 x 1.9 mm (LxDia. max), Lead Dia. 0.53 mm (max)", PackageReference=DO-35A, PackageVersion=1989, Published=8-Jun-2000, Publisher="Altium Limited"
DS1 DS2 DS3 DS4 DS5 DS6 DS7 DS8 DS9 DS10 LED1 LED2 LED3 LED4: PackageDocument=Feb-2002, LatestRevisionDate=17-Jul-2002, LatestRevisionNote="Re-released for DXP Platform.", PackageReference=3.2X1.6X1.1, Published=8-Jun-2000, Publisher="Altium Limited"
R1 R2 R4 R5 R6 R7 R8 R9 R10 R12 R13 R14 R15 R16 R17 R18 R19 R20 R21 R22 R23 R24 R25 R26 R27 R28 R30 R31 R32 R34 R35 R36 R37 R38 R39 R40 R41 R42: library part Res2, "Resistor", LatestRevisionDate=17-Jul-2002, LatestRevisionNote="Re-released for DXP Platform.", PackageDescription="Axial Device, Thru-Hole; 2 Leads; 0.4 in Pin Spacing", PackageReference=AXIAL-0.4, Published=8-Jun-2000, Publisher="Altium Limited"
R3 R11: library part RES
R29: "Resistor", LatestRevisionDate=17-Jul-2002, LatestRevisionNote="Re-released for DXP Platform.", PackageDescription="Axial Device, Thru-Hole; 2 Leads; 0.4 in Pin Spacing", PackageReference=AXIAL-0.4, Published=8-Jun-2000, Publisher="Altium Limited"
TVS1: library part 稳压二极管, "Zener Diode"
U1: "ARM Cortex-M4 32b MCU+FPU, 210DMIP, 1024 kB Flash, 192+4 kB RAM, Camera, 82 I/Os, 100-pin LQFP, -40 to +85癈, Tray", Operating Frequency (Processor Speed)=168MHz, 16-bit Timers (IC/OC/PWM)=12x16-bit(24/24/30), 32-bit Timer (IC/OC/PWM)="2x32-bit (8/8/8)", A/D Converter=16x12-bit, ComponentLink1Description="Manufacturer URL", ComponentLink1URL=http://www.st.com/, ComponentLink2Description="STM32F405/7 Datasheet", ComponentLink2URL=http://www.st.com/internet/com/TECHNICAL_RESOURCES/TECHNICAL_LITERATURE/DATASHEET/DM00037051.pdf, ComponentLink3Description="STM32F4 Web Page", ComponentLink3URL=http://www.st.com/internet/mcu/subclass/1521.jsp, D/A Converter=2x12-bit, DatasheetVersion="rev2, Jan-2012", Internal RAM=192kB, Other Timer Functions="2xWDG, RTC, 24-bit down counter", PackageDescription="100-Pin Low Profile Quad Flat Package, 14x14 mm Body, 0.5 mm Pitch", PackageReference=LQFP100, PackageVersion=2012, Serial Interface="3xSPI/2xI2S/2xI2C/3xUSART(IrDa, ISO7816)/3xUART/2xUSB OTG FS/HS, 2xCAN/Ethernet MAC10/100, SDIO"
U3: Dropout Voltage=1.3V@(1A), JLCPCB Part Class="Extended Part", LCSC Part Name=AMS1117-3.3, Manufacturer=UMW(广东友台半导体), Maximum Input Voltage=18V, Output Current=1A, Output Voltage=3.3V, Power Supply Rejection Ratio (PSRR)=60dB@(120Hz), Add into BOM=yes, Convert to PCB=yes, Datasheet=https://atta.szlcsc.com/upload/public/pdf/source/20211011/50CC665C22E3A66C08379A4A74BDA25C.pdf, Device=AMS1117-3.3_C347222, Manufacturer Part=AMS1117-3.3, Name=AMS1117-3.3, Number of Outputs=1, Output Polarity=正, Output Type=固定, Supplier=LCSC, Supplier Footprint=SOT-223, Supplier Part=C347222, Symbol=AMS1117-3.3_C347222
U22: library part L7912CV
Y1 Y2: LatestRevisionDate=17-Jul-2002, LatestRevisionNote="Re-released for DXP Platform.", Published=8-Jun-2000, Publisher="Altium Limited"

## Free pads (board coordinates)
  round 6 hole 3.2: 0(39,39) 1(-39,39) 2(39,-39) 3(-39,-39)

## Via types
v1: diameter 0.559, hole 0.305, Top Layer to Bottom Layer, 112 vias
v2: diameter 0.61, hole 0.305, Top Layer to Bottom Layer, 72 vias

## Nets (pads, with @x,y where several pads share a name; then routed paths per layer and width w, separated by ;. In a path a pad name is that pad's centre, name@x,y a point inside that pad or via, vN(x,y) a via of type N, cw(c..) or ccw(c..) an arc to the next point about the centre after c; other vN are vias at no path point)
+3.3V: C1.1 C2.1 C3.1 C4.1 C5.1 C6.1 C7.1 C12.1 C14.2 C22.1 J5.4 R1.2 R3.2 R4.2 R11.2 U1.6 U1.11 U1.19 U1.28 U1.50 U1.75 U1.100 U2.16 U3.2 U3.4 | length 121
  Top Layer w0.305: R1.2@25.248,-3.986 R1.2@25.248,-3.859 ; R1.2@25.4,-4.013 25.4,-4.14 25.883,-4.623 26.01,-4.623 27.076,-5.69 27.254,-5.69 27.737,-6.172 27.737,-6.426 26.693,-7.47 26.566,-7.47 v1(26.518,-7.518) ; C2.1@30.446,-6.299 30.48,-6.333 v1(30.48,-7.468) ; v1(32.969,-7.468) 32.969,-6.35 C1.1@33.02,-6.299
  VCC w0.305: v1(26.518,-7.518) 26.564,-7.472 30.476,-7.472 v1(30.48,-7.468)
  VCC w0.508: v2(36.768,17.235) 36.768,23.001 J5.4@40.183,26.416
  Bottom Layer w0.305: C5.1@19.355,5.006 19.837,4.523 U1.50@21.919,4.523 ; C5.1@19.355,5.131 19.355,5.258 18.085,6.528 18.085,8.865 19.355,10.135 C14.2@19.355,10.262 ; C4.1@19.864,-6.478 21.919,-6.478 21.922,-6.481 23.288,-6.481 23.856,-5.913 ; U1.50@22.567,4.522 23.012,4.522 23.856,3.677 23.856,-5.913 ; U1.19@26.472,-8.379 26.472,-7.564 v1(26.518,-7.518) 24.912,-5.913 23.856,-5.913 ; U2.16@28.499,10.82 28.502,10.817 29.67,10.817 30.175,10.312 ; C12.1@29.616,8.484 29.693,8.484 30.175,8.966 30.175,10.312 ; U1.11@30.472,-8.379 30.472,-7.476 v1(30.48,-7.468) v1(32.969,-7.468) ; U1.6@32.969,-9.026 v1(32.969,-7.468) ; U3.4@33.54,17.218 U3.4@33.557,17.235 ; U1.100@36.372,-7.474 32.976,-7.474 v1(32.969,-7.468) ; C22.1@36.551,12.014 34.849,10.312 30.175,10.312 ; U1.100@37.019,-7.476 37.285,-7.476 37.287,-7.479 37.287,-9.322 37.77,-9.804 C7.1@37.846,-9.804 ; C6.1@39.776,6.375 C6.1@39.776,6.248 35.472,6.248 35.469,6.246 35.469,1.432 32.969,-1.068 v1(32.969,-7.468)
  Bottom Layer w0.762: C22.1@36.551,12.014 37.948,10.617 37.948,8.204 C6.1@39.776,6.375
  Bottom Layer w1.016: U3.4@33.54,17.218 34.035,16.723 34.035,15.698 36.311,13.422 36.311,12.254 C22.1@36.551,12.014 ; U3.4@33.557,17.235 v2(36.768,17.235) U3.2@39.98,17.235 ; R3.2@36.932,26.467 36.957,26.441 40.157,26.441 J5.4@40.183,26.416 R11.2@40.183,29.159 R4.2@40.183,31.852
+5V: C10.1 C13.2 J2.3 J3.3 J4.3 J6.2 J13.3 R5.2 R6.2 R7.2 R8.2 R9.2 R10.2 R39.2 R40.2 U3.3 | length 66.7
  Bottom Layer w0.762: 43.061,-6.773 J4.3@47.549,-6.773 ; 43.078,-17.272 J13.3@47.549,-17.272 ; 43.095,3.725 J3.3@47.549,3.725 ; C10.1@43.536,14.224 J2.3@47.549,14.224
  Bottom Layer w1.27: C13.2@39.776,12.04 39.776,12.141 R6.2@43.002,12.141 ; U3.3@39.98,14.935 42.824,14.935 C10.1@42.977,14.783 43.002,14.757 R6.2@43.002,12.141 ; R6.2@43.028,12.141 R6.2@43.002,12.141 ; 43.061,-6.773 43.028,-6.807 ; 43.078,-17.272 43.028,-17.323 ; 43.095,3.725 43.028,3.658 ; J6.2@45.415,-26.06 45.364,-26.01 43.993,-26.01 43.028,-25.044 R39.2@43.028,-22.087 R40.2@43.028,-19.445 43.028,-17.323 ; R6.2@43.002,12.141 43.002,9.5 R5.2@43.028,9.5 43.028,3.658 ; 43.028,-17.323 R9.2@43.028,-11.499 R10.2@43.028,-8.908 43.028,-6.807 ; 43.028,-6.807 R7.2@43.028,-1.106 R8.2@43.028,1.535 43.028,3.658
A1: J2.1 R5.1 U1.67 | length 24.4
  VCC w0.203: v1(31.445,3.2) 38.202,3.2 45.225,10.224 J2.1@47.549,10.224
  Bottom Layer w0.203: v1(31.445,3.2) 31.457,3.212 31.457,6.059 U1.67@31.469,6.071 ; R5.1@45.314,9.5 45.441,9.5 46.165,10.224 J2.1@47.549,10.224
A2: J3.1 R7.1 U1.77 | length 16.7
  VCC w0.203: v1(38.506,0.559) 39.34,-0.275 J3.1@47.549,-0.275
  Bottom Layer w0.203: U1.77@37.019,4.024 38.191,4.024 38.506,3.708 v1(38.506,0.559) ; R7.1@45.314,-1.106 45.441,-1.106 46.272,-0.275 J3.1@47.549,-0.275
A3: J4.1 R9.1 U1.90 | length 19.4
  VCC w0.203: v1(35.611,-2.438) 38.252,-2.438 46.587,-10.773 J4.1@47.549,-10.773
  Bottom Layer w0.203: v1(35.611,-2.438) 35.63,-2.458 37.013,-2.458 U1.90@37.032,-2.476 ; R9.1@45.314,-11.499 45.441,-11.499 46.166,-10.773 J4.1@47.549,-10.773
A4: J13.1 R39.1 U1.92 | length 27
  VCC w0.203: v1@35.763,-3.454 36.474,-3.454 44.907,-11.887 44.907,-18.63 J13.1@47.549,-21.272
  Bottom Layer w0.203: v1@35.763,-3.454 35.774,-3.465 U1.92@37.03,-3.465 ; R39.1@45.314,-22.087 45.441,-22.087 46.255,-21.272 J13.1@47.549,-21.272 ; U1.92@37.03,-3.465 U1.92@37.031,-3.466
  other v1: 35.611,-3.454
B1: J2.2 R6.1 U1.68 | length 23.4
  VCC w0.203: v1(32.36,3.81) 38.1,3.81 46.514,12.224 J2.2@47.549,12.224
  Bottom Layer w0.203: U1.68@31.969,6.071 31.969,4.246 32.36,3.856 v1(32.36,3.81) ; R6.1@45.314,12.141 45.396,12.224 J2.2@47.549,12.224
B2: J3.2 R8.1 U1.89 | length 15.1
  VCC w0.203: v1(40.386,0.457) 41.654,1.725 J3.2@47.549,1.725
  Bottom Layer w0.203: U1.89@36.395,-1.976 38.054,-1.976 40.318,0.288 40.318,0.389 v1(40.386,0.457) ; R8.1@45.314,1.535 45.504,1.725 J3.2@47.549,1.725
B3: J4.2 R10.1 U1.91 | length 15.2
  VCC w0.203: v1(39.878,-2.946) 45.705,-8.773 J4.2@47.549,-8.773
  Bottom Layer w0.203: U1.91@37.019,-2.977 37.034,-2.962 39.863,-2.962 v1(39.878,-2.946) ; R10.1@45.314,-8.908 45.448,-8.773 J4.2@47.549,-8.773
B4: J13.2 R40.1 U1.93 | length 22.8
  VCC w0.203: v1@38.276,-3.884 46.025,-11.633 46.025,-17.748 J13.2@47.549,-19.272
  Bottom Layer w0.203: U1.93@37.019,-3.977 37.037,-3.958 38.257,-3.958 v1(38.303,-3.912) ; R40.1@45.314,-19.445 45.487,-19.272 J13.2@47.549,-19.272
GND1: C1.2 C2.2 C3.2 C4.2 C5.2 C6.2 C7.2 C8.1 C9.1 C10.2 C12.2 C13.1 C15.1 C16.1 C17.1 C18.1 C20.1 C21.2 C22.2 J1.1 J2.4 J3.4 J4.4 J5.1 J6.1 J13.4 K1.2 LED1.2 R2.2 U1.10 U1.20 U1.27 U1.74 U1.99 U2.15 U3.1 U6.3 U7.3 U9.3 U10.3 U11.3 U13.3 U14.3 U16.3 U18.3 U21.3 | length 133.1
  Bottom Layer w0.203: U1.74@34.969,6.073 34.969,7.131 35.45,7.612 35.45,8.171 C9.1@35.712,8.433 ; U1.99@37.508,-6.96 R2.2@39.692,-6.96 ; R2.2@39.776,-6.96 39.861,-6.875 R2.2@40.149,-6.875
  Bottom Layer w0.254: C4.2@19.355,-8.636 C4.2@19.355,-8.534 ; C4.2@19.469,-8.395 19.863,-8.001 19.888,-8.001 20.91,-6.979 U1.27@21.917,-6.979
  Bottom Layer w0.305: v1(21.747,-10.566) 21.722,-10.592 21.722,-11.506 v1(21.697,-11.532) 21.671,-11.532 20.498,-12.704 v1(20.472,-12.704) v1(20.472,-14.427) v1(20.472,-16.15) v1(20.472,-17.873) v1(20.472,-19.597) v1(20.472,-21.32) 21.793,-22.641 v1@21.793,-23.673 ; v1@21.747,-10.49 21.773,-10.465 24.061,-10.465 24.163,-10.566 v1(24.232,-10.566) 24.206,-10.592 24.206,-11.506 v1(24.181,-11.532) 24.204,-11.532 25.4,-12.727 v1@25.4,-12.751 ; v1(21.793,-23.774) v1(24.232,-23.774) 24.229,-23.772 24.229,-22.608 v1@25.502,-21.336 ; U1.27@21.917,-6.979 U1.27@21.919,-6.977 ; v1(25.4,-12.704) 26.056,-13.36 C16.1@26.975,-13.36 ; v1(25.502,-21.32) 25.543,-21.32 26.061,-20.802 26.823,-20.802 26.975,-20.65 27.026,-20.65 v1(29.21,-18.466) v1(29.21,-13.868) ; U1.20@25.969,-9.026 25.969,-10.069 v1(26.975,-11.074) C16.1@26.975,-12.878 ; C12.2@27.33,8.484 27.203,8.484 26.721,8.966 26.721,11.735 27.025,12.039 28.447,12.039 U2.15@28.499,12.09 v1(30.175,12.09) 33.045,12.09 C22.2@33.122,12.014 ; v1@30.117,-24.105 v1@30.117,-22.25 ; v1(30.124,-24.13) 30.193,-24.13 30.396,-24.333 33.019,-24.333 33.273,-24.079 v1(33.325,-24.079) ; v1(30.124,-22.25) v1(30.123,-16.295) ; v1@30.132,-16.286 30.132,-15.156 30.378,-14.91 29.386,-13.917 29.309,-13.917 29.235,-13.843 29.235,-11.506 v1(29.21,-11.481) 29.921,-10.77 v1(30.785,-10.77) 30.785,-10.701 30.969,-10.516 U1.10@30.969,-9.674 ; v1(32.664,-10.77) 33.579,-10.77 v1(34.29,-11.481) ; v1@33.274,-22.098 33.325,-22.047 33.325,-20.615 33.207,-20.498 33.233,-20.498 33.325,-20.406 v1(33.325,-18.593) v1@33.325,-18.445 ; v1@33.275,-22.214 v1(33.325,-22.215) v1(33.325,-22.215) v1@33.325,-23.962 ; v1@33.325,-18.44 v1(33.325,-16.295) 33.325,-15.062 33.122,-14.859 34.29,-13.691 34.29,-11.702 34.138,-11.55 v1@34.138,-11.481 ; C9.1@35.916,8.433 36.271,8.788 v1(36.271,9.55) ; C6.2@39.776,3.962 C6.2@39.827,3.912
  Bottom Layer w0.508: C4.2@19.609,-8.636 19.736,-8.763 19.736,-9.968 19.761,-9.994 v1(19.761,-10.008)
  Bottom Layer w0.762: v1(13.005,-19.71) 15.037,-19.71 U16.3@15.443,-19.304 ; v1(13.106,-36.322) 14.935,-36.322 U21.3@15.443,-35.814 ; v1(13.208,-3.099) 14.855,-3.099 U13.3@15.388,-2.565 ; v1@13.31,32.766 13.314,32.771 15.092,32.771 U7.3@15.596,33.274 ; v1(13.313,13.262) 13.316,13.265 15.145,13.265 U10.3@15.646,13.767 ; C5.2@19.355,7.417 19.456,7.315 v1(20.523,7.315) ; C20.1@19.355,22.809 19.406,22.86 v2(20.574,22.86) ; v1(19.456,-1.219) 19.456,-0.051 19.406,0 C8.1@19.66,0.254 ; v1(33.274,29.058) 34.646,29.058 C21.2@34.696,29.108 ; C7.2@39.776,-9.652 40.03,-9.906 C7.2@40.081,-9.906 ; C7.2@39.776,-9.55 v1(39.776,-8.433) R2.2@39.776,-7.061 ; v1(39.776,2.743) 39.776,3.861 C6.2@39.827,3.912 ; v1(39.776,8.585) C13.1@39.776,9.754 ; U3.1@39.98,19.535 41.653,19.535 C10.2@42.977,18.212 ; C10.2@43.358,18.593 46.899,22.134 46.899,22.21 47.803,23.114 J5.1@47.803,26.416
  other v1: 22.708,-33.122 22.708,-31.699 24.13,-31.699 21.806,-22.667 24.243,-22.635 33.325,-20.523 30.175,-20.472 30.175,-18.542 34.29,-13.868 13.312,32.768 23.978,33.223 25.4,33.223 23.978,34.646 19.101,39.776
GND2: C26.2 C27.1 C28.1 C29.2 C30.2 C31.2 C32.2 D3.2 D4.2 D7.2 D8.2 D11.2 D12.2 D15.2 D16.2 D20.2 D21.2 R29.2 R41.2 R42.2 TVS1.1 U4.1 U4.2 U4.10 U4.11 U4.19 U4.20 U5.6 U5.7 U6.5 U7.5 U8.1 U8.2 U8.10 U8.11 U8.19 U8.20 U9.5 U10.5 U11.5 U12.1 U12.2 U12.10 U12.11 U12.19 U12.20 U13.5 U14.5 U15.1 U15.2 U15.10 U15.11 U15.19 U15.20 U16.5 U18.5 U20.1 U20.2 U20.10 U20.11 U20.19 U20.20 U21.5 U22.2 U23.2 | length 127
  Top Layer w0.508: v2(-17.221,-23.876) -16.312,-22.967 U15.10@-13.542,-22.967 ; v2(-16.866,-28.143) -16.838,-28.143 -16.811,-28.17 -13.535,-28.17 -13.581,-28.216 U20.2@-13.581,-29.44 ; v1(-16.053,29.616) -16.045,29.608 -13.499,29.608 U4.10@-13.491,29.601 ; U20.10@-13.581,-39.6 U20.11@-0.859,-39.6 -0.864,-39.605 v2(-0.864,-40.742) ; U15.2@-13.542,-12.807 -13.542,-11.537 -13.536,-11.532 v2(-10.77,-11.532) ; U12.10@-13.491,-6.452 v2(-10.77,-6.452) ; U12.2@-13.491,3.708 U12.1@-13.491,4.978 v1(-10.82,4.978) ; U8.10@-13.491,10.115 -13.488,10.112 -10.671,10.112 v1(-10.668,10.109) ; U8.2@-13.491,20.275 U8.1@-13.491,21.545 -13.488,21.542 v1@-10.62,21.542 ; U4.2@-13.491,39.878 U4.1@-13.491,41.031 ; U4.1@-13.454,41.038 -9.863,41.038 v2(-9.855,41.046) ; v1(-4.013,-28.194) -3.999,-28.194 -3.976,-28.17 U20.20@-0.859,-28.17 ; v2(-3.556,40.996) -3.528,40.996 -3.485,41.038 -0.777,41.038 U4.20@-0.769,41.031 ; v1(-3.55,29.558) -3.536,29.558 -3.494,29.601 U4.11@-0.769,29.601 ; v1(-3.454,-22.962) -3.452,-22.964 -0.822,-22.964 U15.11@-0.82,-22.967 ; v2(-3.454,-6.452) U12.11@-0.769,-6.452 ; v1(-3.454,10.058) -3.441,10.058 -3.384,10.115 U8.11@-0.769,10.115 ; v1(-3.404,4.978) -0.61,4.978 -0.61,3.754 -0.656,3.708 U12.19@-0.769,3.708 ; v2(-3.353,-11.481) -3.325,-11.481 -3.269,-11.537 U15.20@-0.82,-11.537 ; U20.20@-0.864,-28.194 -0.859,-28.199 U20.19@-0.859,-29.44 ; U15.19@-0.82,-12.807 -0.757,-12.807 -0.711,-12.761 U15.20@-0.711,-11.537 ; U20.20@-0.813,-28.194 U20.20@-0.762,-28.143 ; U8.19@-0.769,20.275 -0.706,20.275 U8.19@-0.66,20.321 ; U4.19@-0.769,39.761 U4.20@-0.769,40.95 ; v1@-0.716,22.357 v1(-0.711,22.352) U8.20@-0.711,21.591
  Top Layer w0.762: v2(3.556,2.337) U11.5@5.465,2.337 ; v1(3.581,-14.021) 5.315,-14.021 U14.5@5.415,-14.121 ; v2(3.658,18.847) U9.5@5.588,18.847 ; v1(3.759,-30.683) 5.45,-30.683 U18.5@5.501,-30.734 ; v2(3.81,38.456) 5.436,38.456 U6.5@5.486,38.405
  Top Layer w1.27: D20.2@-24.994,-28.483 -24.927,-28.55 v2(-23.012,-28.55) D21.2@-20.93,-28.55 ; D15.2@-24.994,-10.603 -20.995,-10.603 D16.2@-20.879,-10.719 ; D11.2@-24.943,3.672 -20.843,3.672 D12.2@-20.828,3.658 ; D7.2@-24.943,20.335 -20.915,20.335 D8.2@-20.879,20.371 ; D3.2@-24.536,42.433 D4.2@-20.502,42.433
  Top Layer w2.032: D21.2@-20.959,-28.483 -19.362,-26.887 -19.362,-25.458 U5.7@-19.177,-25.273 U5.6@-15.367,-25.273
  Bottom Layer w0.762: U16.5@5.44,-21.793 v2(7.772,-21.793) ; U21.5@5.559,-38.398 v2(7.881,-38.398) ; U13.5@5.681,-5.232 v2(7.772,-5.232) ; U7.5@5.712,30.74 8.122,30.74 v2(8.128,30.734) ; U10.5@5.719,11.125 v2(8.077,11.125)
  Bottom Layer w1.27: v1(-33.782,-36.881) -33.782,-34.85 TVS1.1@-33.64,-34.708
  other v1: -11.481,-49.124 -25.4,-48.463 -25.4,-44.501 -32.36,-44.247 -13.208,-42.621 -10.617,21.539
  other v2: -22.911,-10.516 -22.911,3.658 -22.911,20.371 -22.454,42.469
IN1: R12.2 U4.7 U6.6 | length 28.2
  Top Layer w0.508: U4.7@-13.491,33.411 -13.483,33.418 -6.51,33.418 v1(-6.502,33.426) ; v2(3.708,35.865) 5.603,35.865 U6.6@5.61,35.858 7.722,35.858 8.179,36.315 8.179,41.023 7.798,41.404 R12.2@7.714,41.404
  Bottom Layer w0.508: v1(-6.502,33.426) -4.064,35.865 v2(3.708,35.865)
IN2: R15.2 U4.9 U7.6 | length 30.2
  Top Layer w0.508: U4.9@-13.491,30.871 -6.546,30.871 -6.479,30.937 v2(-6.452,30.937)
  Bottom Layer w0.508: v2(-6.452,30.937) -4.16,33.229 U7.6@5.712,33.229 ; U7.6@5.712,33.28 7.531,33.28 7.829,33.577 R15.2@7.829,41.404